# Altium PCB MBHP_CORE_LPC176x.PcbDoc (part 1 of 2)
Units mm, origin at the board's own origin, x right, y up, seen from the top; angles counter-clockwise.
Board outline 120 x 100 mm, 2 copper layers (Top Layer, Bottom Layer), stack 1.571 mm thick; 70 components, 109 nets, 446 pads, 2 vias.
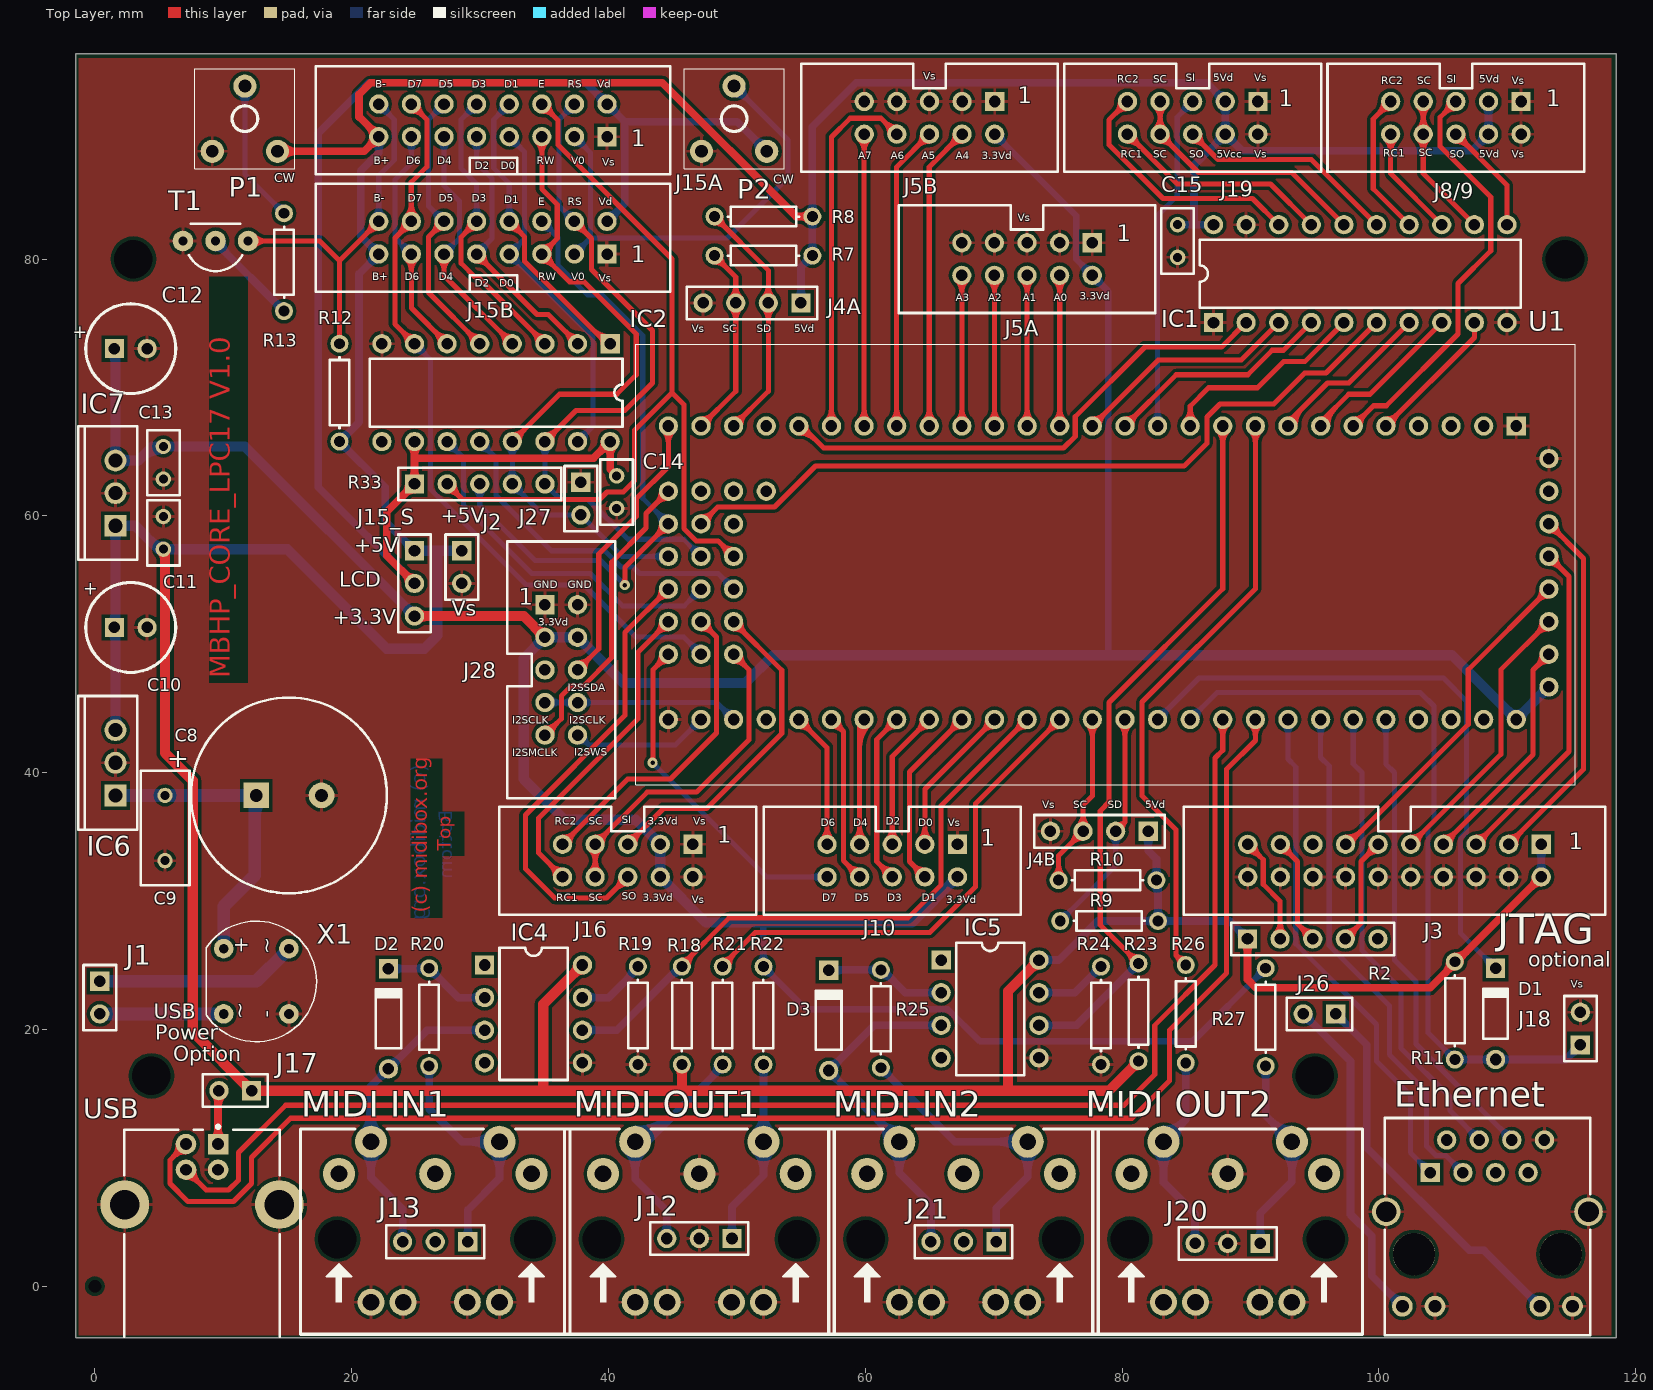
[diagram p0: Top Layer view]
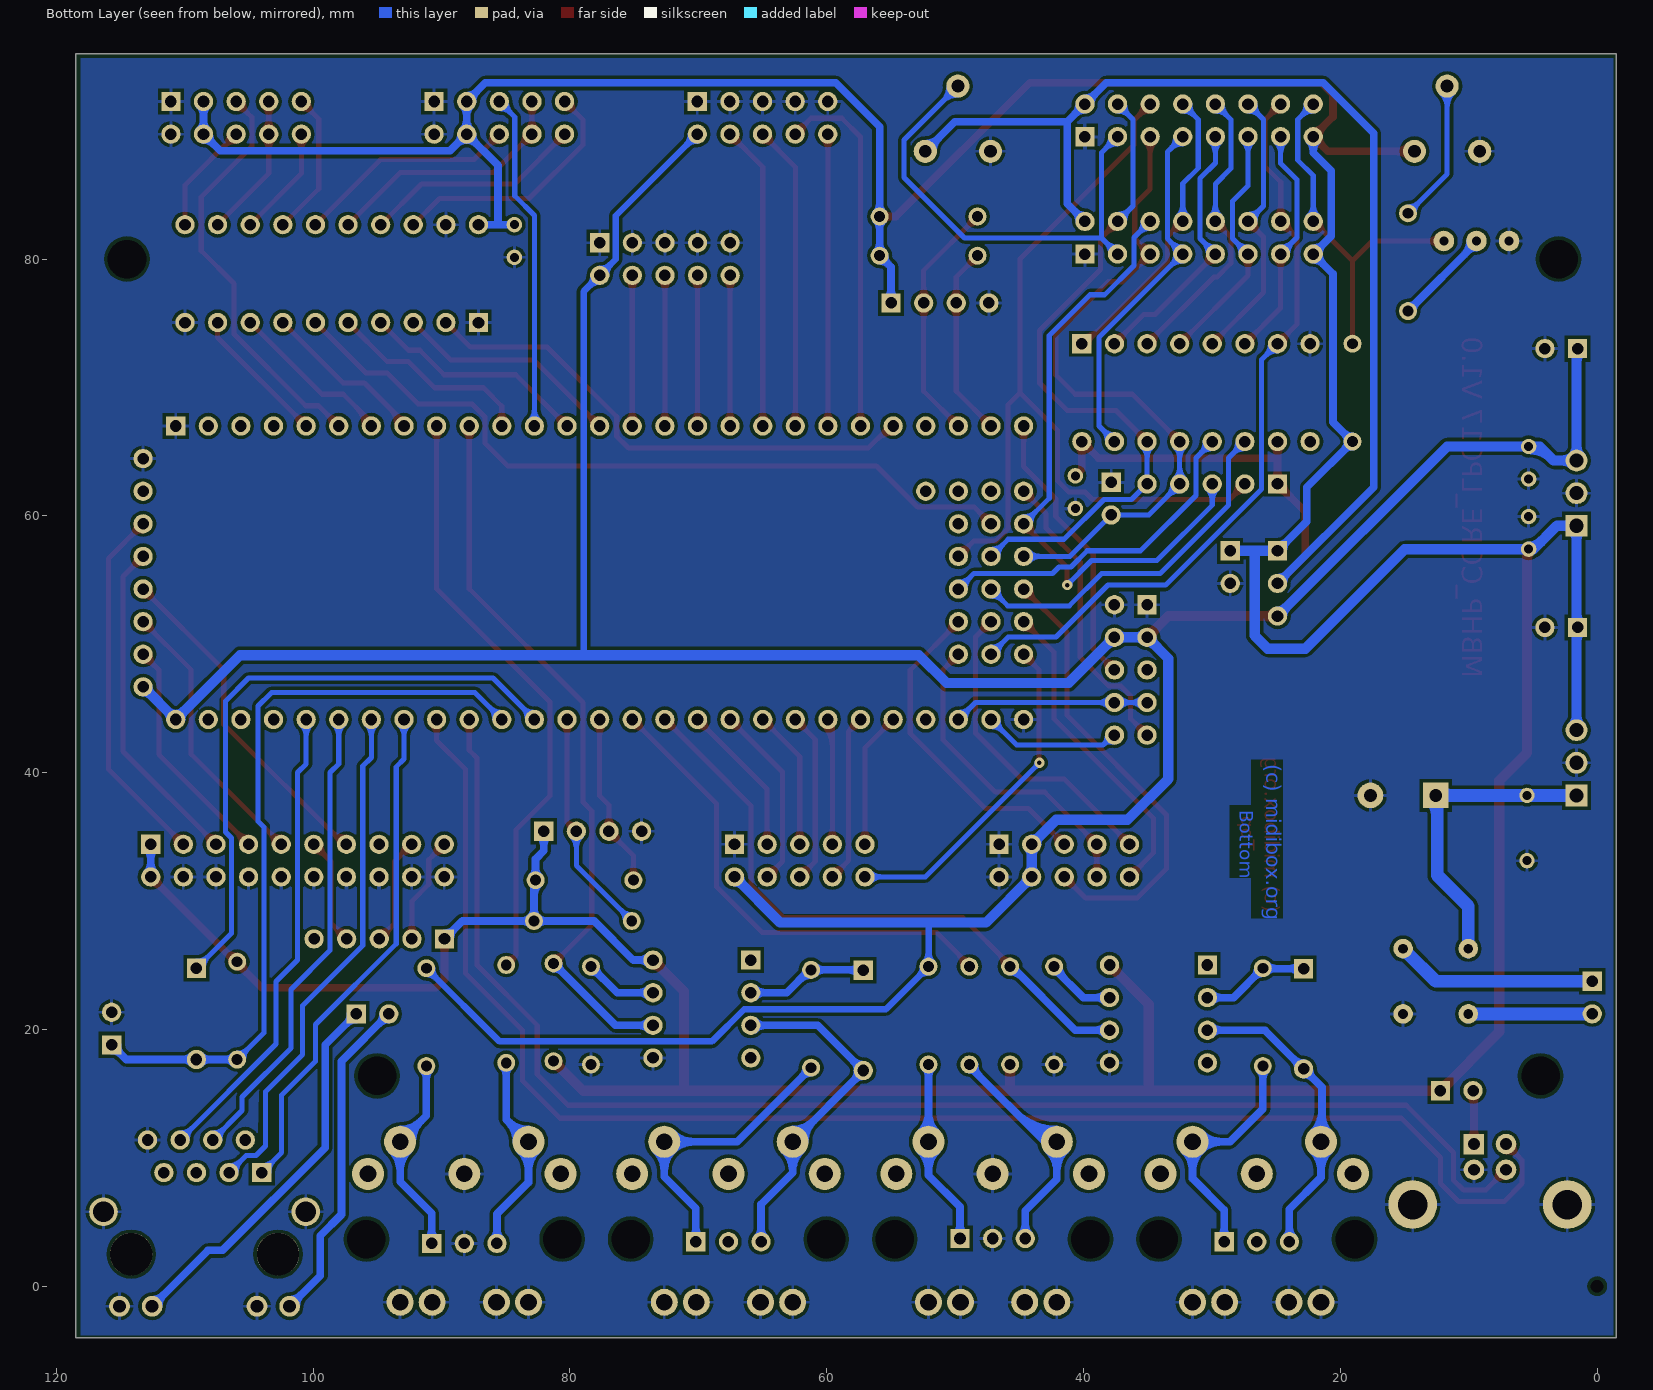
[diagram p1: Bottom Layer view, seen from below]

## Layer stack, top to bottom
Top Layer: signal copper 0.0356
Dielectric: core 1.5, FR-4, Dk 4.8
Bottom Layer: signal copper 0.0356

## Board outline
-1.5,-4 118.5,-4 118.5,96 -1.5,96

## Design rules (kind name [scope] priority, off if disabled: settings)
Clearance [All] p1: gap=0.254
ComponentClearance [All] p1: gap=0 collisioncheckmode=3 verticalgap=0 showdistances=FALSE
Height [All] p1: minheight=0 maxheight=50 prefheight=12.7
HoleSize [All] p1: absolutevalues=TRUE maxlimit=7 minlimit=0.025 maxpercent=80.000 minpercent=20.000
MinimumSolderMaskSliver [All] p1: minsoldermaskwidth=0.18
PolygonConnect [All] p1: connectstyle=Relief reliefconductorwidth=0.254 reliefentries=4 polygonreliefangle="90 Angle" airgapwidth=0.254
RoutingVias [All] p1: holewidth=0.35 width=0.8 viastyle="Through Hole" minholewidth=0.3 minwidth=0.7 maxholewidth=0.711 maxwidth=1.27
SilkToSilkClearance [All] p1: silktosilkclearance=0.1
SilkscreenOverComponentPads [All] p1: minsilkscreentomaskgap=0
SolderMaskExpansion [All] p1: expansion=0.102
Width [All] p1: maxlimit=4 minlimit=0.23 preferedwidth=0.6 minimp=50.000000 maximp=50.000000 favimp=50.000000
22 further rules are at their usual default settings.

## Components (designator, comment, footprint, x,y, rotation, side; value= is the part's Value field where it differs from the comment)
C8 "Cap Pol2" RB5-15 15.113,38.227 r180 top
C9 "Cap2" RAD-0.2 5.461,35.687 r270 top
C10 "Cap Pol2" RB2.54-7 2.794,51.308 r0 top
C11 "Cap2" RAD-0.1 5.334,58.674 r90 top
C12 "Cap Pol2" RB2.54-7 2.794,73.025 r0 top
C13 "Cap2" RAD-0.1 5.334,64.135 r270 top
C14 "Cap2" RAD-0.1 40.64,61.849 r270 top
C15 "Cap2" RAD-0.1 84.328,81.407 r270 top
D1 "Diode 1N4148" DO-35 109.093,21.209 r90 top
D2 "1N4148" DO-35A 22.86,20.828 r90 top
D3 "1N4148" DO-35A 57.15,20.701 r90 top
Ethernet "RJ45_LEDS" CON_RJ45_RA_LEDS 108.455,2.5 r0 top
IC1 "SN74HCT541N" N020 98.552,78.867 r0 top
IC2 "SN74HTC595N" N016 31.242,69.596 r180 top
IC4 "6N138" DIP-8 34.163,21.209 r270 top
IC5 "6N138" DIP-8 69.723,21.59 r270 top
IC6 "7805" TO220V 1.6,40.767 r90 top
IC7 "LF33" TO220V 1.6,61.767 r90 top
J1 "Power" HDR1X2#1 0.381,23.749 r270 top
J2 "" HDR1X2#1 28.575,57.277 r270 top
J3 "JTAG" "HDR2X10 - big" 101.219,33.147 r180 top
J4A "IIC1" HDR1X4 54.991,76.581 r180 top
J4B "IIC2" HDR1X4 82.042,35.433 r180 top
J5A "Header 5X2" "HDR2X5 - big" 72.6,80 r180 top
J5B "Header 5X2" "HDR2X5 - big" 65,91 r180 top
J8/9 "Header 5X2" "HDR2X5 - big" 106,91 r180 top
J10 "Header 5X2" "HDR2X5 - big" 62.103,33.147 r180 top
J12 "Header 3" HDR1X3 47.08,3.717 r180 top
J13 "Header 3" HDR1X3 26.506,3.463 r180 top
J15_S "Header 3" HDR1X3 24.892,54.737 r270 top
J15A "LCD1" HDR2X8 31,90.805 r0 top
J15B "LCD2" HDR2X8 31,81.661 r0 top
J16 "Header 5X2" "HDR2X5 - big" 41.5,33.147 r180 top
J17 "Header 2" HDR1X2#2 12.192,15.24 r180 top
J18 "CAN" HDR1X2#1 115.697,18.796 r90 top
J19 "Header 5X2" "HDR2X5 - big" 85.5,91 r180 top
J20 "Header 3" HDR1X3 88.228,3.336 r180 top
J21 "Header 3" HDR1X3 67.654,3.463 r180 top
J26 "LEDs" HDR1X2#1 96.647,21.209 r180 top
J27 "BSL HOLD" HDR1X2#1 37.846,62.611 r270 top
J28 "Header 5X2" "HDR2X5 - big" 36.322,48 r270 top
"MIDI IN1" "MAB-5-SH" MAB-5-SH-2 26.506,5 r0 top
"MIDI IN2" "MAB-5-SH" MAB-5-SH-2 67.654,5 r0 top
"MIDI OUT1" "MAB-5-SH" MAB-5-SH-2 47.08,5 r0 top
"MIDI OUT2" "MAB-5-SH" MAB-5-SH-2 88.228,5 r0 top
P1 "Luminance" CA6V 11.684,90.932 r0 top
P2 "Contrast" CA6V 49.784,90.932 r0 top
R2 "Resistor Network5" RN1X5 94.85,27.051 r0 top
R7 "Res1 US" AXIAL-0.3 52.07,80.264 r180 top
R8 "Res1 US" AXIAL-0.3 52.07,83.312 r180 top
R9 "Res1 US" AXIAL-0.3 78.994,28.448 r180 top
R10 "Res1 US" AXIAL-0.3 78.867,31.623 r180 top
R11 "Res1 US" AXIAL-0.3 105.918,21.463 r90 top
R12 "Res1 US" AXIAL-0.3 19.05,69.596 r270 top
R13 "Res1 US" AXIAL-0.3 14.732,79.756 r270 top
R18 "Res1 US" AXIAL-0.3 45.72,21.082 r270 top
R19 "Res1 US" AXIAL-0.3 42.291,21.082 r90 top
R20 "Res1 US" AXIAL-0.3 26.035,20.955 r270 top
R21 "Res1 US" AXIAL-0.3 48.895,21.082 r270 top
R22 "Res1 US" AXIAL-0.3 52.07,21.082 r90 top
R23 "Res1 US" AXIAL-0.3 81.28,21.336 r270 top
R24 "Res1 US" AXIAL-0.3 78.359,21.082 r90 top
R25 "Res1 US" AXIAL-0.3 61.214,20.828 r270 top
R26 "Res1 US" AXIAL-0.3 84.963,21.209 r270 top
R27 "Res1 US" AXIAL-0.3 91.186,20.955 r90 top
R33 "Resistor Network5" RN1X5 29.972,62.484 r0 top
T1 "BC337" "TO-92 Wide" 9.398,81.407 r90 top
U1 "LPCXpresso1769" "LPCXPRESSO1769 - SMALL" 110.707,67 r180 top
USB "1-1470156-1" 1-1470156 8.345,-3.937 r270 top
X1 "Bridge Rectifier" B40C800 12.573,23.749 r90 top

## Footprints (in the part's own frame and the unit in brackets; to place one, negate y for a bottom-side part, rotate by r counter-clockwise, add the part's x,y. Pads: shape width x height; smd on the part's side, far side on the other; paste and mask are expansions set on the pad)
1-1470156 [mm] "Connector; USB1.1, Type B, Thru-Hole; 4 Position; Right Angle"
  rect 1.6x1.6 hole 0.92: 1(-15.01,1.25)
  round 1.6 hole 0.92: 2(-15.01,-1.25) 3(-13.01,-1.25) 4(-13.01,1.25)
  round 3.8 hole 2.3: 5(-10.3,6.02) 6(-10.3,-6.02)
  silkscreen extent -16.48,-6.05 -0.02,6.05, body extent -16.07,-6.05 0,6.02, height 12
AXIAL-0.3 [mm] "Resistor; 2 Leads"
  round 1.4 hole 0.85: 1(-3.81,0) 2(3.81,0)
  silkscreen extent -2.77,-0.76 2.77,0.76, body extent -3.4,-1.33 3.6,1.27, height 2.59
B40C800 [mil] "S1B, 1N Package, Shindengen"
  round 60 hole 30: 1(100,100) 2(-100,100) 3(100,-100) 4(-100,-100)
  silkscreen extent -185,-185 185,154, body extent -186,-185 185,154, height 276
CA6V [mm] "PT 15 NV"
  round 1.8 hole 1: 1(2.54,-2.54) 2(-2.54,-2.54) 3(0,2.54)
  silkscreen extent -3.9,-3.9 3.9,3.9, body extent -3.9,-3.9 3.9,3.9, height 4
CON_RJ45_RA_LEDS [mm]
  rect 1.5x1.5 hole 0.9: 1(-4.445,6.35)
  round 1.5 hole 0.9: 2(-3.175,8.89) 3(-1.905,6.35) 4(-0.635,8.89) 5(0.635,6.35) 6(1.905,8.89) 7(3.175,6.35)
  round 1.5 hole 0.9 mask+0: 8(4.445,8.89)
  round 1.62 hole 1: 9(-6.625,-4.06) 11(4.085,-4.06) 12(6.625,-4.06)
  round 1.62 hole 1 mask+0: 10(-4.085,-4.06)
  round 2.23 hole 1.6: MH1(-7.875,3.3) MH2(7.875,3.3)
  round 3.3 hole 3.3 unplated: MH3(-5.715,0) MH4(5.715,0)
  silkscreen extent -8,-6.31 8,10.6, body extent -7.9,-10.71 7.97,10.6, height 13.14
DIP-8 [mm] "DIP; 8 Leads; Row Spacing 7.62 mm; Pitch 2.54 mm"
  rect 1.5x1.5 hole 0.9: 1(-3.81,-3.81)
  round 1.5 hole 0.9: 2(-1.27,-3.81) 3(1.27,-3.81) 4(3.81,-3.81) 5(3.81,3.81) 6(1.27,3.81) 7(-1.27,3.81) 8(-3.81,3.81)
  silkscreen extent -5.15,-2.65 5.15,2.65, body extent -5.09,-2.69 5.2,2.65, height 3.1
DO-35 [mm] "Diode, Axial; Body 3.8 x 1.9 mm (LxDia. max), Lead Dia. 0.53 mm (max)"
  round 1.5 hole 0.9: 1(-3.55,0)
  rect 1.5x1.5 hole 0.9: 2(3.55,0)
  silkscreen extent -1.95,-0.95 2.05,0.95, body extent -2.52,-1.36 2.48,1.24, height 2.59
DO-35A [mm] "Diode, Axial; Body 4.6 x 1.9 mm (LxDia. max), Lead Dia. 0.53 mm (max)"
  round 1.5 hole 0.9: 1(-3.9,0)
  rect 1.5x1.5 hole 0.9: 2(3.9,0)
  silkscreen extent -2.3,-1 2.4,1, body extent -2.63,-1.29 2.37,1.3, height 2.59
HDR1X2#1 [mm]
  rect 1.5x1.5 hole 0.9: 1(0,0)
  round 1.5 hole 0.9: 2(2.54,0)
  silkscreen extent -1.27,-1.27 3.81,1.27, body extent -1.27,-1.27 3.81,1.27, height 8.41
HDR1X2#2 [mm]
  rect 1.5x1.5 hole 0.9: 1(-0.01,0.007)
  round 1.5 hole 0.9: 2(2.53,0.007)
  silkscreen extent -1.28,-1.26 3.8,1.28, body extent -1.28,-1.26 3.8,1.28, height 8.41
HDR1X3 [mm] "Connector; Header; 3 Position"
  rect 1.5x1.5 hole 0.9: 1(-2.54,0)
  round 1.5 hole 0.9: 2(0,0) 3(2.54,0)
  silkscreen extent -3.81,-1.27 3.81,1.27
HDR1X4 [mm] "Connector; Header; 4 Position"
  rect 1.5x1.5 hole 0.9: 1(0,0)
  round 1.5 hole 0.9: 2(2.54,0) 3(5.08,0) 4(7.62,0)
  silkscreen extent -1.27,-1.27 8.89,1.27, body extent -1.27,-1.32 8.91,1.22, height 8.41
"HDR2X5 - big" [mm] "Connector; Header; 5x2 Position"
  rect 1.5x1.5 hole 0.9: 1(-5.08,-1.27)
  round 1.5 hole 0.9: 2(-5.08,1.27) 3(-2.54,-1.27) 4(-2.54,1.27) 5(0,-1.27) 6(0,1.27) 7(2.54,-1.27) 8(2.54,1.27) 9(5.08,-1.27) 10(5.08,1.27)
  silkscreen extent -10,-4.2 10,4.2, body extent -9.97,-4.25 10.02,4.18, height 10
HDR2X8 [mm] "Connector; Header; 8x2 Position"
  round 1.5 hole 0.9: 1(-8.89,-1.27) 2(-8.89,1.27) 3(-6.35,-1.27) 4(-6.35,1.27) 5(-3.81,-1.27) 6(-3.81,1.27) 7(-1.27,-1.27) 8(-1.27,1.27) 9(1.27,-1.27) 10(1.27,1.27) 11(3.81,-1.27) 12(3.81,1.27) 13(6.35,-1.27) 14(6.35,1.27) 16(8.89,1.27)
  rect 1.5x1.5 hole 0.9: 15(8.89,-1.27)
  silkscreen extent -13.8,-4.2 13.8,4.2, body extent -10.1,-2.49 10.23,2.59, height 8.41
"HDR2X10 - big" [mm] "Connector; Header; 10x2 Position"
  rect 1.5x1.5 hole 0.9: 1(-11.43,-1.27)
  round 1.5 hole 0.9: 2(-11.43,1.27) 3(-8.89,-1.27) 4(-8.89,1.27) 5(-6.35,-1.27) 6(-6.35,1.27) 7(-3.81,-1.27) 8(-3.81,1.27) 9(-1.27,-1.27) 10(-1.27,1.27) 11(1.27,-1.27) 12(1.27,1.27) 13(3.81,-1.27) 14(3.81,1.27) 15(6.35,-1.27) 16(6.35,1.27) 17(8.89,-1.27) 18(8.89,1.27) 19(11.43,-1.27) 20(11.43,1.27)
  silkscreen extent -16.4,-4.2 16.4,4.2, body extent -16.4,-4.2 16.42,4.2, height 10
"LPCXPRESSO1769 - SMALL" [mm]
  rect 1.5x1.5 hole 0.9: 1(0,0)
  round 1.5 hole 0.9: 2(2.54,0) 3(5.08,0) 4(7.62,0) 5(10.16,0) 6(12.7,0) 7(15.24,0) 8(17.78,0) 9(20.32,0) 10(22.86,0) 11(25.4,0) 12(27.94,0) 13(30.48,0) 14(33.02,0) 15(35.56,0) 16(38.1,0) 17(40.64,0) 18(43.18,0) 19(45.72,0) 20(48.26,0) 21(50.8,0) 22(53.34,0) 23(55.88,0) 24(58.42,0) 25(60.96,0) 26(63.5,0) 27(66.04,0) 28(0,22.86) 29(2.54,22.86) 30(5.08,22.86) 31(7.62,22.86) 32(10.16,22.86) 33(12.7,22.86) 34(15.24,22.86) 35(17.78,22.86) 36(20.32,22.86) 37(22.86,22.86) 38(25.4,22.86) 39(27.94,22.86) 40(30.48,22.86) 41(33.02,22.86) 42(35.56,22.86) 43(38.1,22.86) 44(40.64,22.86) 45(43.18,22.86) 46(45.72,22.86) 47(48.26,22.86) 48(50.8,22.86) 49(53.34,22.86) 50(55.88,22.86) 51(58.42,22.86) 52(60.96,22.86) 53(63.5,22.86) 54(66.04,22.86) 55(-2.54,20.32) 56(-2.54,17.78) 57(-2.54,15.24) 58(-2.54,12.7) 59(-2.54,10.16) 60(-2.54,7.62) 61(-2.54,5.08) 62(-2.54,2.54) 63(58.42,5.08) 64(60.96,5.08) 65(63.5,5.08) 66(66.04,5.08) 67(60.96,7.62) 68(63.5,7.62) 69(66.04,7.62) 70(60.96,10.16) 71(63.5,10.16) 72(66.04,10.16) 73(60.96,12.7) 74(63.5,12.7) 75(66.04,12.7) 76(60.96,15.24) 77(63.5,15.24) 78(66.04,15.24) 79(60.96,17.78) 80(63.5,17.78) 81(66.04,17.78)
  silkscreen extent -4.6,-6.35 68.58,27.94, body extent -4.6,-6.35 68.58,27.94, height 7
MAB-5-SH-2 [mm]
  round 0 hole 3 unplated: 0(-7.62,-1.33) 0(7.62,-1.33)
  round 2.5 hole 1.3: 1(7.5,3.75) 2(0,3.75) 3(-7.5,3.75) 4(5,6.25) 5(-5,6.25)
  round 2.1 hole 1.3: MH1(2.5,-6.25) MH1(5,-6.25) MH2(-5,-6.25) MH2(-2.5,-6.25)
  silkscreen extent -10.5,-8.75 10.5,7.25, body extent -10.34,-8.95 10.36,7.31, height 21.4
N016 [mm] "DIP; 16 Leads; Row Spacing 7.62 mm; Pitch 2.54 mm"
  rect 1.5x1.5 hole 0.9: 1(-8.89,-3.81)
  round 1.5 hole 0.9: 2(-6.35,-3.81) 3(-3.81,-3.81) 4(-1.27,-3.81) 5(1.27,-3.81) 6(3.81,-3.81) 7(6.35,-3.81) 8(8.89,-3.81) 9(8.89,3.81) 10(6.35,3.81) 11(3.81,3.81) 12(1.27,3.81) 13(-1.27,3.81) 14(-3.81,3.81) 15(-6.35,3.81) 16(-8.89,3.81)
  silkscreen extent -9.85,-2.65 9.85,2.65, body extent -9.79,-2.67 9.8,2.67, height 3.1
N020 [mm] "DIP; 20 Leads; Row Spacing 7.62 mm; Pitch 2.54 mm"
  rect 1.5x1.5 hole 0.9: 1(-11.43,-3.81)
  round 1.5 hole 0.9: 2(-8.89,-3.81) 3(-6.35,-3.81) 4(-3.81,-3.81) 5(-1.27,-3.81) 6(1.27,-3.81) 7(3.81,-3.81) 8(6.35,-3.81) 9(8.89,-3.81) 10(11.43,-3.81) 11(11.43,3.81) 12(8.89,3.81) 13(6.35,3.81) 14(3.81,3.81) 15(1.27,3.81) 16(-1.27,3.81) 17(-3.81,3.81) 18(-6.35,3.81) 19(-8.89,3.81) 20(-11.43,3.81)
  silkscreen extent -12.5,-2.65 12.5,2.65, body extent -12.44,-2.67 12.5,2.67, height 3.1
RAD-0.1 [mm] "Indicating Instrument; 2 Leads"
  round 1.2 hole 0.7: 1(-1.27,0) 2(1.27,0)
  silkscreen extent -2.54,-1.27 2.54,1.27, body extent -2.54,-1.27 2.54,1.27, height 7
RAD-0.2 [mm] "Radial Cap, Thru-Hole; 2 Leads; 0.2 in Pin Spacing"
  round 1.2 hole 0.7: 1(-2.54,0) 2(2.54,0)
  silkscreen extent -4.44,-1.91 4.44,1.91
RB2.54-7 [mm] "Motor, General Kind; 2 Leads"
  rect 1.5x1.5 hole 0.9: 1(-1.27,0)
  round 1.5 hole 0.9: 2(1.27,0)
  silkscreen extent -3.5,-3.5 3.5,3.5, body extent -3.57,-3.39 3.4,3.59, height 10
RB5-15 [mm] "Polarized Capacitor (Radial); 2 Leads"
  rect 2x2 hole 1: 1(2.54,0)
  round 2 hole 1: 2(-2.54,0)
  silkscreen extent -7.62,-7.62 7.62,7.62, body extent -7.48,-7.46 7.46,7.52, height 10
RN1X5 [mm] "Resistor net; 5 Pins"
  rect 1.5x1.5 hole 0.9: 1(-5.08,0)
  round 1.5 hole 0.9: 2(-2.54,0) 3(0,0) 4(2.54,0) 5(5.08,0)
  silkscreen extent -6.35,-1.27 6.35,1.27, body extent -6.35,-0.95 6.38,1.02, height 6
TO220V [mm] "TO, Thru-Hole, Vertical, Heatsink Mounted; 3 In-Line Leads; Pitch 2.54 mm; Pin sequence 1, 3, 2"
  rect 1.7x1.7 hole 1.1: 1(-2.54,0)
  round 1.7 hole 1.1: 2(2.54,0) 3(0,0)
  silkscreen extent -5.2,-1.7 5.2,2.9, body extent -5.37,-1.84 5.34,2.96, height 17
"TO-92 Wide" [mm] "TO, Flat Index; 3 In-Line, Axial Leads; Body Dia. 4.6mm; Leads 0.41 x 0.39 mm (max)"
  round 1.6 hole 0.7: 1(0,2.54) 2(0,0) 3(0,-2.54)
  silkscreen extent -2.34,-2.07 1.35,2.07, body extent -2.21,-2.47 1.48,2.33, height 8

## Part data
C8 C10 C12: "Polarized Capacitor (Axial)"
C9 C11 C13 C14 C15: "Capacitor"
D1: "High Conductance Fast Diode"
D2 D3: library part "Diode 1N4148", "High Conductance Fast Diode"
Ethernet: library part CON_RJ45_RA_LEDS, "Socket, 1x1 Tab-DOWN R/A 8-Way RJ45"
IC1: "Octal Buffer and Line Driver with 3-State Outputs"
IC2: "8-Bit Shift Register with 3-State Output Registers"
IC6 IC7: library part L7812CV, "Positive Voltage Regulator"
J1 J2 J18 J26 J27: library part "Header 2", "Header, 2-Pin"
J3: library part "Header 10X2", "Header, 10-Pin, Dual row"
J4A J4B: library part "Header 4", "Header, 4-Pin"
J5A J5B J8/9 J10 J16 J19 J28: "Header, 5-Pin, Dual row"
J12 J13 J15_S J20 J21: "Header, 3-Pin"
J15A J15B: library part "Header 8X2", "Header, 8-Pin, Dual row"
J17: "Header, 2-Pin"
"MIDI IN1" "MIDI IN2" "MIDI OUT1" "MIDI OUT2": "Socket, 5-way R/A DIN"
P1 P2: library part RPot, "Potentiometer"
R2 R33: library part "Resistor Network_5"
R7 R8 R9 R10 R11 R12 R13 R18 R19 R20 R21 R22 R23 R24 R25 R26 R27: "Resistor"
T1: library part BC550, "NPN General Purpose Amplifier"
USB: "USB 1.1, Right Angle, Thru-Hole, B Type, Receptacle, 4 Position, White"

## Free pads (board coordinates)
  rect 0x0 hole 1 unplated: 0(0,0)
  round 0 hole 3 unplated: 0(4.408,16.383) 1(95.022,16.383) 2(3,80) 3(114.5,80)

## Via types
v1: diameter 0.8, hole 0.35, Top Layer to Bottom Layer, 2 vias

## Nets (pads, with @x,y where several pads share a name; then routed paths per layer and width w, separated by ;. In a path a pad name is that pad's centre, name@x,y a point inside that pad or via, vN(x,y) a via of type N, cw(c..) or ccw(c..) an arc to the next point about the centre after c; other vN are vias at no path point)
3.3VCC: C12.1 C13.1 IC7.2 J5A.2 J5B.2 J10.2 J15_S.3 J16.3 J16.4 J28.3 J28.4 R22.2 R27.2 U1.28 U1.55 | length 314.2
  Top Layer w0.8: J15_S.3@24.892,52.197 33.395,52.197 J28.3@35.052,50.54 ; J15_S.3@25.139,51.95 cw(c25.737,51.352) 25.737,52.197 cw(c25.737,53.042) J15_S.3@25.139,52.444 ; J28.3@34.702,50.54 ccw(c33.857,50.54) 34.455,51.137 ccw(c35.052,51.735) J28.3@35.052,50.89
  Bottom Layer w0.5: R22.2@51.752,25.21 ccw(c50.984,25.978) 52.07,25.978 ccw(c53.156,25.978) R22.2@52.388,25.21 ; R22.2@52.07,24.442 cw(c52.07,23.356) 52.838,24.124 cw(c53.606,24.892) R22.2@52.52,24.892 ; 52.07,28.321 R22.2@52.07,24.892 55.388,21.574 66.432,21.574 68.94,19.066 85.487,19.066 R27.2@91.186,24.765 R27.2@91.056,24.895 ; J5B.2@70.08,89.23 cw(c70.08,88.023) 70.934,88.876 cw(c71.787,89.73) J5B.2@70.58,89.73 ; J5B.2@70.08,89.73 76.426,83.384 76.426,79.984 J5A.2@77.68,78.73 78.941,77.469 78.941,49.276 ; J5A.2@77.18,78.73 ccw(c75.973,78.73) 76.826,79.584 ccw(c77.68,80.437) J5A.2@77.68,79.23 ; J5A.2@77.68,78.23 cw(c77.68,77.023) 78.534,77.876 cw(c79.387,78.73) J5A.2@78.18,78.73 ; R27.2@90.736,24.765 cw(c89.65,24.765) 90.418,23.997 cw(c91.186,23.229) R27.2@91.186,24.315
  Bottom Layer w0.8: C12.1@1.277,72.778 cw(c0.496,71.997) 1.6,71.997 ; IC7.2@1.282,64.625 ccw(c0.514,65.393) 1.6,65.393 ccw(c2.686,65.393) 1.918,64.625 ccw(c2.686,65.393) 2.686,64.307 ccw(c2.686,63.221) IC7.2@1.918,63.989 ; C12.1@1.6,73 IC7.2@1.6,64.307 3.367,64.307 4.465,65.405 C13.1@5.334,65.405 11.684,65.405 J15_S.3@24.892,52.197 ; 3.509,64.449 cw(c5.334,62.624) C13.1@5.334,65.205 ; J15_S.3@24.542,52.197 ccw(c23.697,52.197) 24.295,52.794 ccw(c24.892,53.392) J15_S.3@24.892,52.547 ; J28.3@34.702,50.54 cw(c33.857,50.54) 34.455,49.943 cw(c35.052,49.345) J28.3@35.052,50.19 ; J28.3@35.299,50.293 cw(c35.897,49.695) 35.897,50.54 cw(c35.897,51.385) J28.3@35.299,50.787 ; J28.4@37.345,50.293 ccw(c36.747,49.695) 36.747,50.54 ccw(c36.747,51.385) J28.4@37.345,50.787 ; J28.4@37.592,50.19 cw(c37.592,49.345) 38.189,49.943 cw(c38.787,50.54) J28.4@37.942,50.54 ; J16.3@43.69,34.417 ccw(c42.845,34.417) 43.443,35.014 ccw(c44.04,35.612) J16.3@44.04,34.767 ; J16.4@43.793,32.124 ccw(c43.195,32.722) 44.04,32.722 ccw(c44.885,32.722) J16.4@44.287,32.124 ; J16.3@43.793,34.17 cw(c43.195,33.572) 44.04,33.572 cw(c44.885,33.572) J16.3@44.287,34.17 ; J16.4@44.04,31.527 cw(c44.04,30.682) 44.637,31.28 cw(c45.235,31.877) J16.4@44.39,31.877 ; J10.2@66.833,31.877 cw(c65.988,31.877) 66.586,31.28 cw(c67.183,30.682) J10.2@67.183,31.527 ; J10.2@67.183,31.877 63.627,28.321 52.07,28.321 47.596,28.321 J16.4@44.04,31.877 J16.3@44.04,34.417 42.135,36.322 36.576,36.322 33.401,39.497 33.401,48.889 J28.3@35.052,50.54 J28.4@37.592,50.54 41.142,46.99 50.673,46.99 52.832,49.149 105.698,49.149 U1.28@110.707,44.14 U1.55@113.247,46.68 ; U1.28@110.357,44.14 ccw(c109.512,44.14) 110.11,44.737 ccw(c110.707,45.335) 110.707,44.49 ccw(c110.707,45.335) 111.304,44.737 ccw(c111.902,44.14) U1.28@111.057,44.14 ; U1.55@112.897,46.68 cw(c112.052,46.68) 112.65,46.083 cw(c113.247,45.485) U1.55@113.247,46.33
5VCC: C10.1 C11.1 C15.1 IC1.20 IC4.8 IC5.8 IC6.2 IC7.1 J2.1 J3.1 J3.2 J4A.1 J4B.1 J8/9.3 J8/9.4 J15_S.1 J15A.1 J15B.1 J17.1 J19.3 J19.4 P1.1 R2.1 R7.1 R8.1 R9.1 R10.1 R11.2 R12.2 R18.2 R23.2 | length 507.8
  Top Layer w0.6: P1.1@14.224,88.392 20.967,88.392 J15A.1@22.11,89.535 20.574,91.071 20.574,92.837 21.463,93.726 44.196,93.726 54.61,83.312 R8.1@55.88,83.312 ; P1.1@14.648,87.968 cw(c15.673,86.943) 15.673,88.392 cw(c15.673,89.841) P1.1@14.648,88.816 ; J15A.1@22.11,89.085 ccw(c22.11,87.999) 21.342,88.767 ccw(c20.574,89.535) 21.66,89.535 ccw(c20.574,89.535) 21.342,90.303 ccw(c22.11,91.071) J15A.1@22.11,89.985 ; R8.1@55.597,83.029 ccw(c54.914,82.346) 54.914,83.312 ccw(c54.914,84.278) R8.1@55.597,83.595 ; R2.1@89.452,26.733 cw(c88.684,25.965) 89.77,25.965 cw(c90.856,25.965) R2.1@90.088,26.733 ; R2.1@89.77,27.051 89.77,23.895 90.424,23.241 104.013,23.241 J3.2@112.649,31.877 ; 105.145,24.373 ccw(c104.246,25.273) R11.2@105.518,25.273 ; 105.452,24.68 cw(c105.918,24.214) R11.2@105.918,24.873 ; R11.2@105.918,25.673 ccw(c105.918,26.945) 106.818,26.046 ; R11.2@106.318,25.273 cw(c106.977,25.273) 106.511,25.739 ; J3.2@112.199,31.877 cw(c111.113,31.877) 111.881,31.109 cw(c112.649,30.341) J3.2@112.649,31.427
  Top Layer w0.8: C11.1@5.193,57.263 cw(c4.528,56.598) 5.468,56.598 ; C11.1@5.334,57.404 5.468,57.27 5.468,41.522 7.62,39.37 7.62,19.805 12.192,15.233 J17.1@12.202,15.233 34.798,15.233 ; J17.1@11.588,15.837 ccw(c12.202,16.451) J17.1@12.202,15.583 ; J17.1@11.611,15.814 cw(c11.03,15.233) J17.1@11.852,15.233 ; J17.1@12.449,14.985 cw(c13.047,14.388) 13.047,15.233 cw(c13.047,16.078) J17.1@12.449,15.48 ; IC4.8@37.623,25.019 cw(c36.778,25.019) 37.376,24.422 cw(c37.973,23.824) IC4.8@37.973,24.669 ; IC4.8@37.973,25.019 34.925,21.971 34.925,15.36 34.798,15.233 ; R18.2@45.508,17.06 cw(c44.996,16.548) 45.72,16.548 cw(c46.444,16.548) R18.2@45.932,17.06 ; R18.2@45.72,17.272 45.72,15.36 45.593,15.233 ; IC5.8@73.183,25.4 cw(c72.338,25.4) 72.936,24.803 cw(c73.533,24.205) IC5.8@73.533,25.05 ; IC5.8@73.533,25.4 71.12,22.987 71.12,15.233 ; R23.2@80.98,17.526 cw(c80.256,17.526) 80.768,17.014 cw(c81.28,16.502) R23.2@81.28,17.226 ; R23.2@81.28,17.526 78.987,15.233 71.12,15.233 ; 34.798,15.233 45.593,15.233 ; 45.593,15.233 71.12,15.233
  Bottom Layer w0.6: R12.2@19.05,65.386 cw(c19.05,64.42) 19.733,65.103 cw(c20.416,65.786) 19.45,65.786 cw(c20.416,65.786) 19.733,66.469 cw(c19.05,67.152) R12.2@19.05,66.186 ; J15A.1@21.792,89.217 cw(c21.024,88.449) 22.11,88.449 cw(c23.196,88.449) J15A.1@22.428,89.217 ; J15B.1@22.11,79.941 ccw(c22.11,78.855) 21.342,79.623 ccw(c20.574,80.391) 21.66,80.391 ccw(c20.574,80.391) 21.342,81.159 ccw(c22.11,81.927) J15B.1@22.11,80.841 ; J15A.1@22.11,89.535 22.11,88.277 20.701,86.868 20.701,81.8 J15B.1@22.11,80.391 20.574,78.855 20.574,67.31 R12.2@19.05,65.786 22.606,62.23 22.606,59.563 J15_S.1@24.892,57.277 ; J15_S.1@24.442,57.277 ccw(c23.356,57.277) 24.124,58.045 ccw(c24.892,58.813) J15_S.1@24.892,57.727 ; 25.654,49.657 25.654,49.784 ; J4A.1@54.673,76.899 ccw(c53.905,77.667) 54.991,77.667 ccw(c56.077,77.667) J4A.1@55.309,76.899 ; J4A.1@54.991,76.581 54.991,79.375 R7.1@55.88,80.264 R8.1@55.88,83.312 55.88,90.297 59.309,93.726 86.584,93.726 J19.3@88.04,92.27 J19.4@88.04,89.73 ; R7.1@55.48,80.264 cw(c54.514,80.264) 55.197,79.581 cw(c55.88,78.898) R7.1@55.88,79.864 ; R7.1@55.597,80.547 ccw(c54.914,81.23) 55.88,81.23 ccw(c56.846,81.23) R7.1@56.163,80.547 ; R8.1@55.597,83.029 cw(c54.914,82.346) 55.88,82.346 cw(c56.846,82.346) R8.1@56.163,83.029 ; R8.1@55.597,83.595 ccw(c54.914,84.278) 55.88,84.278 ccw(c56.846,84.278) R8.1@56.163,83.595 ; IC5.8@73.533,25.527 IC5.8@73.533,25.4 75.057,25.4 78.105,28.448 R9.1@82.804,28.448 ; IC5.8@73.851,25.082 cw(c74.619,24.314) 74.619,25.4 cw(c74.619,26.486) IC5.8@73.851,25.718 ; J4B.1@81.724,35.115 cw(c80.956,34.347) 82.042,34.347 cw(c83.128,34.347) J4B.1@82.36,35.115 ; J4B.1@82.042,35.433 82.042,33.909 82.677,33.274 R10.1@82.677,31.623 82.804,31.496 R9.1@82.804,28.448 ; R10.1@82.394,31.34 cw(c81.405,30.351) 82.804,30.351 ; R10.1@82.394,31.906 ccw(c81.711,32.589) 82.677,32.589 ccw(c83.643,32.589) R10.1@82.96,31.906 ; R9.1@82.521,28.165 ccw(c81.838,27.482) 81.838,28.448 ccw(c81.838,29.414) 82.521,28.731 ccw(c81.838,29.414) 82.804,29.414 ccw(c83.77,29.414) 83.087,28.731 ccw(c83.77,29.414) 83.77,28.448 ccw(c83.77,27.482) R9.1@83.087,28.165 ; C15.1@84.328,82.677 IC1.20@87.122,82.677 ; 85.598,82.81 85.598,87.288 J19.4@88.04,89.73 ; J19.4@87.59,89.73 cw(c86.504,89.73) 87.272,88.962 cw(c88.04,88.194) 88.04,89.28 cw(c88.04,88.194) 88.808,88.962 cw(c89.576,89.73) J19.4@88.49,89.73 ; J19.3@87.59,92.27 ccw(c86.504,92.27) 87.272,93.038 ccw(c88.04,93.806) J19.3@88.04,92.72 ; J19.4@87.722,90.048 ccw(c86.954,90.816) 88.04,90.816 ccw(c89.126,90.816) J19.4@88.358,90.048 ; J19.3@87.722,91.952 cw(c86.954,91.184) 88.04,91.184 cw(c89.126,91.184) J19.3@88.358,91.952 ; R2.1@89.32,27.051 ccw(c88.234,27.051) 89.002,27.819 ccw(c89.77,28.587) R2.1@89.77,27.501 ; R2.1@89.77,27.051 88.373,28.448 R9.1@82.804,28.448 ; J8/9.4@108.09,89.73 cw(c107.004,89.73) 107.772,88.962 cw(c108.54,88.194) J8/9.4@108.54,89.28 ; J8/9.4@108.222,90.048 ccw(c107.454,90.816) 108.54,90.816 ccw(c109.626,90.816) J8/9.4@108.858,90.048 ; J8/9.3@108.222,91.952 cw(c107.454,91.184) 108.54,91.184 cw(c109.626,91.184) J8/9.3@108.858,91.952 ; J8/9.3@108.54,92.27 J8/9.4@108.54,89.73 107.236,88.426 89.344,88.426 J19.4@88.04,89.73 ; J3.2@112.331,32.195 ccw(c111.563,32.963) 112.649,32.963 ccw(c113.735,32.963) J3.2@112.967,32.195 ; J3.1@112.331,34.099 cw(c111.563,33.331) 112.649,33.331 cw(c113.735,33.331) J3.1@112.967,34.099 ; J3.2@112.649,31.877 J3.1@112.649,34.417
  Bottom Layer w0.8: C10.1@1.277,51.061 cw(c0.496,50.28) 1.6,50.28 ; C10.1@1.277,51.555 ccw(c0.496,52.336) 1.6,52.336 ; IC6.2@1.282,43.625 ccw(c0.514,44.393) 1.6,44.393 ccw(c2.686,44.393) IC6.2@1.918,43.625 ; IC7.1@1.282,58.909 cw(c0.514,58.141) 1.6,58.141 cw(c2.686,58.141) 1.918,58.909 cw(c2.686,58.141) 2.686,59.227 cw(c2.686,60.313) IC7.1@1.918,59.545 ; IC6.2@1.6,43.307 IC7.1@1.6,59.227 3.13,59.227 4.953,57.404 C11.1@5.334,57.404 ; 4.342,58.015 ccw(c5.334,59.007) C11.1@5.334,57.604 ; C11.1@5.278,57.46 C11.1@5.334,57.404 ; J15_S.1@24.892,57.277 26.67,57.277 ; J15_S.1@25.139,57.03 cw(c25.737,56.432) 25.737,57.277 cw(c25.737,58.122) J15_S.1@25.139,57.524 ; J2.1@28.328,57.03 ccw(c27.73,56.432) 27.73,57.277 ccw(c27.73,58.122) J2.1@28.328,57.524 ; J2.1@28.575,57.277 26.67,57.277 ; C11.1@5.334,57.404 14.986,57.404 22.733,49.657 25.654,49.657 26.67,50.673 26.67,57.277
B: J15A.2 J15B.2 R12.1 T1.3 | length 37.2
  Top Layer w0.4: T1.3@11.938,81.407 17.514,81.407 19.05,79.871 ; T1.3@12.362,80.983 cw(c13.387,79.958) 13.387,81.407 cw(c13.387,82.856) T1.3@12.362,81.831 ; R12.1@19.05,73.406 19.05,79.871 ; J15B.2@21.56,82.931 cw(c20.232,82.931) 21.171,81.992 cw(c22.11,81.053) J15B.2@22.11,82.381 ; J15B.2@22.11,82.931 19.05,79.871
  Bottom Layer w0.4: J15B.2@21.721,83.32 ccw(c20.782,84.259) 22.11,84.259 ccw(c23.438,84.259) J15B.2@22.499,83.32 ; J15B.2@22.11,82.931 22.11,86.499 23.314,87.703 23.314,90.871 J15A.2@22.11,92.075 ; J15A.2@22.11,91.525 cw(c22.11,90.197) 23.049,91.136 cw(c23.988,92.075) J15A.2@22.66,92.075
C: J15A.13 J15B.13 P2.3 | length 43.2
  Bottom Layer w0.4: J15B.13@37.35,80.391 38.608,81.649 ; J15B.13@37.35,80.941 ccw(c37.35,82.269) 38.289,81.33 ccw(c39.228,80.391) J15B.13@37.9,80.391 ; J15A.13@37.35,88.985 cw(c37.35,87.657) 38.289,88.596 cw(c39.228,89.535) J15A.13@37.9,89.535 ; J15A.13@37.35,89.535 38.608,88.277 38.608,81.649 ; P2.3@49.784,92.772 cw(c49.784,91.082) 50.979,92.277 cw(c52.174,93.472) P2.3@50.484,93.472 ; P2.3@49.784,93.472 53.975,89.281 53.975,86.36 49.264,81.649 38.608,81.649
GND: "MIDI IN1.MH1" "MIDI IN1.MH2" "MIDI IN2.MH1" "MIDI IN2.MH2" "MIDI OUT1.2" "MIDI OUT1.MH1" "MIDI OUT1.MH2" "MIDI OUT2.2" "MIDI OUT2.MH1" "MIDI OUT2.MH2" C8.2 C9.2 C10.2 C11.2 C12.2 C13.2 C14.2 C15.2 Ethernet.8 Ethernet.10 Ethernet.12 Ethernet.MH1 Ethernet.MH2 IC1.1 IC1.10 IC1.19 IC2.8 IC4.5 IC5.5 IC6.3 IC7.3 J2.2 J3.4 J3.6 J3.8 J3.10 J3.12 J3.14 J3.16 J3.18 J3.20 J4A.4 J4B.4 J5A.1 J5A.3 J5A.5 J5A.7 J5A.9 J5B.1 J5B.3 J5B.5 J5B.7 J5B.9 J8/9.1 J8/9.2 J10.1 J12.2 J15A.15 J15B.15 J16.1 J16.2 J18.2 J19.1 J19.2 J20.2 J27.1 J28.1 J28.2 P1.2 P2.2 R19.1 R24.1 T1.1 U1.1 U1.54 U1.62 USB.4 USB.5 USB.6 X1.4
MISO: IC1.15 J19.6 | length 19.3
  Top Layer w0.4: J19.6@85.5,89.18 cw(c85.5,87.852) 86.439,88.791 cw(c87.378,89.73) J19.6@86.05,89.73 ; J19.6@85.5,89.73 87.473,87.757 93.351,87.757 94.742,87.757 IC1.15@99.822,82.677
MISO1: IC1.11 J8/9.6 | length 10.7
  Top Layer w0.4: J8/9.6@106,89.18 cw(c106,87.852) 106.939,88.791 cw(c107.878,89.73) J8/9.6@106.55,89.73 ; J8/9.6@106,89.73 109.982,85.748 IC1.11@109.982,82.81
MOSI: J19.5 U1.12 | length 30.6
  Bottom Layer w0.4: U1.12@82.378,67.389 ccw(c81.439,68.328) 82.767,68.328 ccw(c84.095,68.328) U1.12@83.156,67.389 ; U1.12@82.767,67 82.767,83.402 84.296,84.931 84.296,91.066 J19.5@85.5,92.27 ; J19.5@84.95,92.27 cw(c83.622,92.27) 84.561,91.331 cw(c85.5,90.392) J19.5@85.5,91.72
MOSI1: J8/9.5 U1.6 | length 35.3
  Top Layer w0.4: U1.6@98.007,67.55 ccw(c98.007,68.878) 98.946,67.939 ; U1.6@98.557,67 cw(c99.885,67) 98.946,67.939 ; J8/9.5@105.45,92.27 cw(c104.122,92.27) 105.061,91.331 cw(c106,90.392) J8/9.5@106,91.72 ; J8/9.5@106,92.27 104.775,91.045 104.775,88.773 108.712,84.836 108.712,80.645 106.172,78.105 106.172,74.168 100.584,68.58 99.587,68.58 98.946,67.939
NetC8_1: C8.1 C9.1 IC6.1 X1.1 | length 30.8
  Bottom Layer w1: IC6.1@1.524,38.227 11.393,38.227 ; X1.1@10.033,26.035 10.033,29.591 12.446,32.004 12.446,38.227 11.43,38.227 ; C8.1@12.206,37.888 ccw(c11.43,37.171) 11.43,38.227 ; C8.1@12.206,38.566 cw(c11.43,39.283) 11.43,38.227 ; C8.1@12.214,37.879 ccw(c11.393,37.085) 11.393,38.227 ; C8.1@12.214,38.575 cw(c11.393,39.369) 11.393,38.227 ; C8.1@12.219,37.873 ccw(c11.366,37.02) 11.366,38.227 ccw(c11.366,39.434) C8.1@12.219,38.581 ; 12.446,36.713 cw(c14.087,36.713) C8.1@12.927,37.873
NetD2_1: "MIDI IN1.5" D2.1 IC4.3 J13.3 | length 37.9
  Bottom Layer w0.6: 20.834,10.578 cw(c19.212,8.956) 21.506,8.956 cw(c23.8,8.956) 22.178,10.578 ; 20.834,11.922 ccw(c19.406,13.35) 21.426,13.35 ; 21.426,13.737 ccw(c23.993,13.737) 22.178,11.922 ; D2.1@22.41,16.928 cw(c21.324,16.928) 22.092,16.16 cw(c22.86,15.392) D2.1@22.86,16.478 ; D2.1@22.86,17.378 ccw(c22.86,18.464) 23.628,17.696 ccw(c24.396,16.928) D2.1@23.31,16.928 ; J13.3@23.648,3.781 ccw(c22.88,4.549) 23.966,4.549 ccw(c25.052,4.549) J13.3@24.284,3.781 ; J13.3@23.966,3.463 23.966,6.006 21.506,8.466 21.506,11.25 21.426,11.33 21.426,15.494 25.871,19.939 IC4.3@30.353,19.939 ; IC4.3@30.035,19.621 ccw(c29.267,18.853) 29.267,19.939 ccw(c29.267,21.025) IC4.3@30.035,20.257
NetD2_2: D2.2 IC4.2 R20.1 | length 14.8
  Bottom Layer w0.6: D2.2@22.86,24.728 25.998,24.728 R20.1@26.035,24.765 ; D2.2@23.178,24.41 cw(c23.946,23.642) 23.946,24.728 cw(c23.946,25.814) D2.2@23.178,25.046 ; 24.98,24.728 ccw(c24.98,25.82) R20.1@25.752,25.048 ; 25.159,24.728 cw(c25.159,23.889) R20.1@25.752,24.482 ; R20.1@26.035,24.365 cw(c26.035,23.399) 26.718,24.082 cw(c27.401,24.765) R20.1@26.435,24.765 ; R20.1@26.072,24.728 28.321,22.479 IC4.2@30.353,22.479 ; IC4.2@30.035,22.161 ccw(c29.267,21.393) 29.267,22.479 ccw(c29.267,23.565) IC4.2@30.035,22.797
NetD3_1: "MIDI IN2.5" D3.1 IC5.3 J21.3 | length 40.8
  Bottom Layer w0.6: D3.1@57.145,16.759 62.654,11.25 62.654,8.847 65.114,6.387 J21.3@65.114,3.463 ; D3.1@57.15,16.351 cw(c57.15,15.378) 57.838,16.066 ; D3.1@57.15,17.251 ccw(c57.15,18.427) 57.981,17.595 ; D3.1@57.169,16.783 60.706,20.32 IC5.3@65.913,20.32 ; 57.892,17.506 ccw(c58.597,16.801) 57.6,16.801 ccw(c58.8,16.801) 57.951,15.953 ; 61.704,11.25 ccw(c59.41,11.25) 61.032,12.872 ccw(c62.654,14.494) 62.654,12.2 ; 61.982,10.578 cw(c60.36,8.956) 62.654,8.956 cw(c64.948,8.956) 63.326,10.578 ; J21.3@64.796,3.781 ccw(c64.028,4.549) 65.114,4.549 ccw(c66.2,4.549) J21.3@65.432,3.781 ; IC5.3@65.595,20.002 ccw(c64.827,19.234) 64.827,20.32 ccw(c64.827,21.406) IC5.3@65.595,20.638
NetD3_2: D3.2 IC5.2 R25.1 | length 15.9
  Bottom Layer w0.6: D3.2@57.15,24.638 61.341,24.638 63.119,22.86 IC5.2@65.913,22.86 ; D3.2@57.468,24.283 cw(c58.326,23.425) 58.326,24.638 ; D3.2@57.468,24.919 ccw(c58.147,25.598) 58.147,24.638 ; R25.1@60.931,24.355 ccw(c60.248,23.672) 60.248,24.638 ccw(c60.248,25.604) R25.1@60.931,24.921 ; R25.1@61.214,24.238 cw(c61.214,22.966) 62.114,23.865 ; R25.1@61.614,24.638 ccw(c62.273,24.638) 61.807,24.172 ; IC5.2@65.595,22.542 ccw(c64.827,21.774) 64.827,22.86 ccw(c64.827,23.946) IC5.2@65.595,23.178
NetEthernet_9: Ethernet.9 J26.2 | length 29.6
  Bottom Layer w0.6: J26.2@94.107,20.759 cw(c94.107,19.673) 94.875,20.441 cw(c95.643,21.209) J26.2@94.557,21.209 ; J26.2@94.107,21.209 97.79,17.526 97.79,5.588 99.441,3.937 99.441,0.829 Ethernet.9@101.83,-1.56 ; Ethernet.9@101.32,-1.56 ccw(c100.089,-1.56) 100.959,-0.689 ccw(c101.83,0.181) Ethernet.9@101.83,-1.05
NetEthernet_11: Ethernet.11 J26.1 | length 33.7
  Bottom Layer w0.6: J26.1@96.647,20.759 cw(c96.647,19.673) 97.415,20.441 cw(c98.183,21.209) J26.1@97.097,21.209 ; J26.1@96.647,21.209 99.062,18.794 99.062,10.793 107.061,2.794 108.186,2.794 Ethernet.11@112.54,-1.56 ; Ethernet.11@112.03,-1.56 ccw(c110.799,-1.56) 111.669,-0.689 ccw(c112.54,0.181) Ethernet.11@112.54,-1.05
NetIC1_12: IC1.12 J8/9.7 J8/9.8 | length 17.4
  Top Layer w0.4: J8/9.8@103.071,89.341 cw(c102.132,88.402) 103.46,88.402 cw(c104.788,88.402) J8/9.8@103.849,89.341 ; J8/9.8@103.071,90.119 ccw(c102.132,91.058) 103.46,91.058 ccw(c104.788,91.058) J8/9.8@103.849,90.119 ; J8/9.7@103.071,91.881 cw(c102.132,90.942) 103.46,90.942 cw(c104.788,90.942) J8/9.7@103.849,91.881 ; 103.46,86.659 IC1.12@107.442,82.677 ; 103.46,86.786 J8/9.8@103.46,89.73 J8/9.7@103.46,92.27
NetIC1_13: IC1.13 J8/9.10 | length 10.8
  Top Layer w0.4: J8/9.10@100.531,89.341 cw(c99.592,88.402) 100.92,88.402 cw(c102.248,88.402) J8/9.10@101.309,89.341 ; J8/9.10@100.92,89.73 100.92,86.659 IC1.13@104.902,82.677
NetIC1_14: IC1.14 J8/9.9 | length 13.4
  Top Layer w0.4: J8/9.9@100.37,92.27 cw(c99.042,92.27) 99.981,91.331 cw(c100.92,90.392) J8/9.9@100.92,91.72 ; J8/9.9@100.92,92.27 99.568,90.918 99.568,85.471 IC1.14@102.362,82.677
NetIC1_16: IC1.16 J19.7 J19.8 | length 26
  Top Layer w0.4: J19.8@82.571,90.119 ccw(c81.632,91.058) 82.96,91.058 ccw(c84.288,91.058) J19.8@83.349,90.119 ; J19.7@82.571,91.881 cw(c81.632,90.942) 82.96,90.942 cw(c84.288,90.942) J19.7@83.349,91.881 ; J19.8@82.96,89.18 cw(c82.96,87.852) 83.899,88.791 cw(c84.838,89.73) J19.8@83.51,89.73 ; J19.7@82.96,92.27 J19.8@82.96,89.73 85.949,86.741 93.218,86.741 IC1.16@97.282,82.677
NetIC1_17: IC1.17 J19.10 | length 19.3
  Top Layer w0.4: J19.10@80.42,89.18 cw(c80.42,87.852) 81.359,88.791 cw(c82.298,89.73) J19.10@80.97,89.73 ; J19.10@80.42,89.73 84.298,85.852 91.567,85.852 IC1.17@94.742,82.677
NetIC1_18: IC1.18 J19.9 | length 21.8
  Top Layer w0.4: J19.9@79.87,92.27 cw(c78.542,92.27) 79.481,91.331 cw(c80.42,90.392) J19.9@80.42,91.72 ; J19.9@80.42,92.27 78.994,90.844 78.994,88.9 83.185,84.709 90.17,84.709 IC1.18@92.202,82.677
NetIC4_7: IC4.7 R19.2 | length 8.4
  Bottom Layer w0.6: IC4.7@37.973,22.479 40.005,22.479 R19.2@42.228,24.702 ; IC4.7@38.291,22.161 cw(c39.059,21.393) 39.059,22.479 cw(c39.059,23.565) IC4.7@38.291,22.797 ; 41.518,23.992 ccw(c40.619,24.892) R19.2@41.891,24.892 ; 41.825,24.299 cw(c42.291,23.833) R19.2@42.291,24.492
NetIC5_7: IC5.7 R24.2 | length 8.9
  Bottom Layer w0.6: IC5.7@73.533,22.86 76.327,22.86 R24.2@78.359,24.892 ; IC5.7@73.851,22.542 cw(c74.619,21.774) 74.619,22.86 cw(c74.619,23.946) IC5.7@73.851,23.178 ; R24.2@77.959,24.892 cw(c76.993,24.892) 77.676,24.209 cw(c78.359,23.526) R24.2@78.359,24.492
NetJ1_1: J1.1 X1.3 | length 15.7
  Bottom Layer w1: J1.1@0.381,23.749 12.573,23.749 14.859,26.035 X1.3@15.113,26.035
NetJ1_2: J1.2 X1.2 | length 9.8
  Bottom Layer w1: J1.2@0.381,21.209 9.779,21.209 X1.2@10.033,20.955
NetJ3_11: J3.11 R2.4 | length 12.6
  Top Layer w0.4: R2.4@97.39,27.051 98.613,28.274 98.613,33.081 J3.11@99.949,34.417 ; R2.4@97.39,27.601 ccw(c97.39,28.929) 98.329,27.99 ccw(c99.268,27.051) R2.4@97.94,27.051 ; J3.11@99.399,34.417 cw(c98.071,34.417) 99.01,33.478 cw(c99.949,32.539) J3.11@99.949,33.867
NetJ3_17: J3.17 R2.3 | length 12.6
  Top Layer w0.4: J3.17@92.329,33.867 cw(c92.329,32.539) 93.268,33.478 cw(c94.207,34.417) J3.17@92.879,34.417 ; J3.17@92.329,34.417 93.665,33.081 93.665,28.236 R2.3@94.85,27.051 ; R2.3@94.3,27.051 ccw(c92.972,27.051) 93.911,27.99 ccw(c94.85,28.929) R2.3@94.85,27.601
NetJ3_19: J3.19 R2.2 | length 12.6
  Top Layer w0.4: J3.19@89.789,33.867 cw(c89.789,32.539) 90.728,33.478 cw(c91.667,34.417) J3.19@90.339,34.417 ; J3.19@89.789,34.417 90.993,33.213 90.993,31.308 92.31,29.991 R2.2@92.31,27.051 ; R2.2@91.921,27.44 ccw(c90.982,28.379) 92.31,28.379 ccw(c93.638,28.379) R2.2@92.699,27.44
NetJ12_1: "MIDI OUT1.4" J12.1 R22.1 | length 25
  Bottom Layer w0.6: J12.1@49.302,4.035 ccw(c48.534,4.803) 49.62,4.803 ccw(c50.706,4.803) J12.1@49.938,4.035 ; J12.1@49.62,3.717 49.62,6.186 52.08,8.646 52.08,11.25 R22.1@52.08,17.272 ; 51.408,10.578 cw(c49.786,8.956) 52.08,8.956 cw(c54.374,8.956) 52.752,10.578 ; 51.408,11.922 ccw(c49.786,13.544) 52.08,13.544 ccw(c54.374,13.544) 52.752,11.922 ; R22.1@51.787,16.989 cw(c51.08,16.282) 52.08,16.282 ; 52.08,16.33 cw(c53.012,16.33) R22.1@52.353,16.989
NetJ12_3: "MIDI OUT1.5" J12.3 R21.2 | length 30.6
  Bottom Layer w0.6: 41.408,10.578 cw(c39.786,8.956) 42.08,8.956 cw(c44.374,8.956) 42.752,10.578 ; 42.08,11.6 ccw(c42.08,14.666) 44.248,12.498 ; 42.08,12.2 ccw(c42.08,16.715) 45.272,13.522 ; J12.3@44.222,4.035 ccw(c43.454,4.803) 44.54,4.803 ccw(c45.626,4.803) J12.3@44.858,4.035 ; J12.3@44.54,3.717 44.54,5.879 42.08,8.339 42.08,11.25 43,11.25 R21.2@48.895,17.145 ; 48.122,16.372 ccw(c47.223,17.272) R21.2@48.495,17.272 ; 48.429,16.679 cw(c48.895,16.213) R21.2@48.895,16.872
NetJ13_1: "MIDI IN1.4" J13.1 R20.2 | length 29.1
  Bottom Layer w0.6: R20.2@25.752,16.862 cw(c25.069,16.179) 26.035,16.179 cw(c27.001,16.179) R20.2@26.318,16.862 ; R20.2@26.035,17.145 26.035,13.806 28.591,11.25 31.506,11.25 31.506,8.392 29.046,5.932 J13.1@29.046,3.463 ; J13.1@28.728,3.781 ccw(c27.96,4.549) 29.046,4.549 ccw(c30.132,4.549) J13.1@29.364,3.781 ; 30.834,11.922 cw(c29.212,13.544) 29.212,11.25 cw(c29.212,8.956) 30.834,10.578 cw(c29.212,8.956) 31.506,8.956 cw(c33.8,8.956) 32.178,10.578
NetJ17_2: J17.2 USB.1 | length 7.8
  Top Layer w0.6: USB.1@9.241,11.427 ccw(c8.388,12.28) 9.595,12.28 ccw(c10.802,12.28) USB.1@9.949,11.427 ; J17.2@9.343,14.914 cw(c8.736,14.307) 9.595,14.307 ; USB.1@9.595,11.073 9.595,15.166 J17.2@9.662,15.233 ; 9.595,13.985 cw(c10.909,13.985) J17.2@9.98,14.914
NetJ20_1: "MIDI OUT2.4" J20.1 R27.1 | length 26.1
  Bottom Layer w0.6: J20.1@90.45,3.654 ccw(c89.682,4.422) 90.768,4.422 ccw(c91.854,4.422) J20.1@91.086,3.654 ; J20.1@90.768,3.336 90.768,5.678 93.228,8.138 93.228,11.25 91.186,13.292 R27.1@91.186,17.145 ; R27.1@90.903,16.862 cw(c90.22,16.179) 91.186,16.179 cw(c92.152,16.179) R27.1@91.469,16.862 ; 92.278,11.25 ccw(c89.984,11.25) 91.606,12.872 ccw(c93.228,14.494) 93.228,12.2 ; 92.556,10.578 cw(c90.934,8.956) 93.228,8.956 cw(c95.522,8.956) 93.9,10.578
NetJ20_3: "MIDI OUT2.5" J20.3 R26.2 | length 26.2
  Bottom Layer w0.6: 82.556,10.578 cw(c80.934,8.956) 83.228,8.956 cw(c85.522,8.956) 83.9,10.578 ; 83.228,12.2 ccw(c83.228,14.494) 84.85,12.872 ccw(c86.472,11.25) 84.178,11.25 ; R26.2@84.68,17.116 cw(c83.997,16.433) 84.963,16.433 cw(c85.929,16.433) R26.2@85.246,17.116 ; R26.2@84.963,17.399 84.963,12.985 83.228,11.25 83.228,8.085 85.688,5.625 J20.3@85.688,3.336 ; J20.3@85.37,3.654 ccw(c84.602,4.422) 85.688,4.422 ccw(c86.774,4.422) J20.3@86.006,3.654
NetJ21_1: "MIDI IN2.4" J21.1 R25.2 | length 33.1
  Bottom Layer w0.6: R25.2@61.214,16.618 cw(c61.214,15.652) 61.897,16.335 cw(c62.58,17.018) R25.2@61.614,17.018 ; R25.2@61.214,17.018 66.982,11.25 72.654,11.25 72.654,8.519 70.194,6.059 J21.1@70.194,3.463 ; J21.1@69.876,3.781 ccw(c69.108,4.549) 70.194,4.549 ccw(c71.28,4.549) J21.1@70.512,3.781 ; 71.982,11.922 cw(c70.36,13.544) 70.36,11.25 cw(c70.36,8.956) 71.982,10.578 cw(c70.36,8.956) 72.654,8.956 cw(c74.948,8.956) 73.326,10.578
NetP1_3: P1.3 R13.1 | length 15.7
  Bottom Layer w0.4: P1.3@11.189,92.977 cw(c9.994,91.782) 11.684,91.782 cw(c13.374,91.782) P1.3@12.179,92.977 ; P1.3@11.684,93.472 11.684,86.614 R13.1@14.732,83.566 ; R13.1@14.232,83.566 ccw(c13.025,83.566) 13.878,84.42 ccw(c14.732,85.273) R13.1@14.732,84.066
NetR13_2: R13.2 T1.2 | length 11
  Bottom Layer w0.6: T1.2@9.339,81.348 14.732,75.956 R13.2@14.732,75.946 ; T1.2@9.398,80.907 cw(c9.398,79.983) 10.052,80.636 ; T1.2@9.898,81.407 ccw(c11.388,81.407) 10.334,80.353 ; 14.042,76.646 cw(c13.343,75.946) R13.2@14.332,75.946 ; 14.066,76.622 ccw(c14.732,77.288) R13.2@14.732,76.346
P0.0: R26.1 U1.9 | length 50.7
  Top Layer w0.4: R26.1@84.465,25.061 ccw(c83.557,25.137) 84.201,25.781 ; R26.1@84.921,25.517 cw(c84.845,26.425) 84.201,25.781 ; R26.1@84.963,25.019 84.201,25.781 ; U1.9@89.998,66.611 cw(c89.059,65.672) 90.387,65.672 cw(c91.715,65.672) U1.9@90.776,66.611 ; U1.9@90.387,67 90.387,54.319 81.563,45.495 81.563,38.198 84.201,35.56 84.201,25.781
P0.1: IC5.6 R23.1 U1.10 | length 64
  Top Layer w0.4: R23.1@80.78,25.146 ccw(c79.573,25.146) 80.426,26 ccw(c81.28,26.853) R23.1@81.28,25.646 ; R23.1@81.28,25.146 78.298,28.128 78.298,37.023 78.994,37.719 78.994,45.466 87.847,54.319 U1.10@87.847,67 ; U1.10@87.458,66.611 cw(c86.519,65.672) 87.847,65.672 cw(c89.175,65.672) U1.10@88.236,66.611
  Bottom Layer w0.6: IC5.6@73.533,20.32 76.454,20.32 R23.1@81.28,25.146 ; IC5.6@73.851,20.002 cw(c74.619,19.234) 74.619,20.32 cw(c74.619,21.406) IC5.6@73.851,20.638 ; R23.1@80.88,25.146 cw(c79.914,25.146) 80.597,24.463 cw(c81.28,23.78) R23.1@81.28,24.746